# Altium PCB PCB.PcbDoc
Units mm, origin at the board's own origin, x right, y up, seen from the top; angles counter-clockwise.
Board outline 26.92 x 29.08 mm, 2 copper layers (Top Layer, Bottom Layer); 14 components, 7 nets, 39 pads, 0 vias.
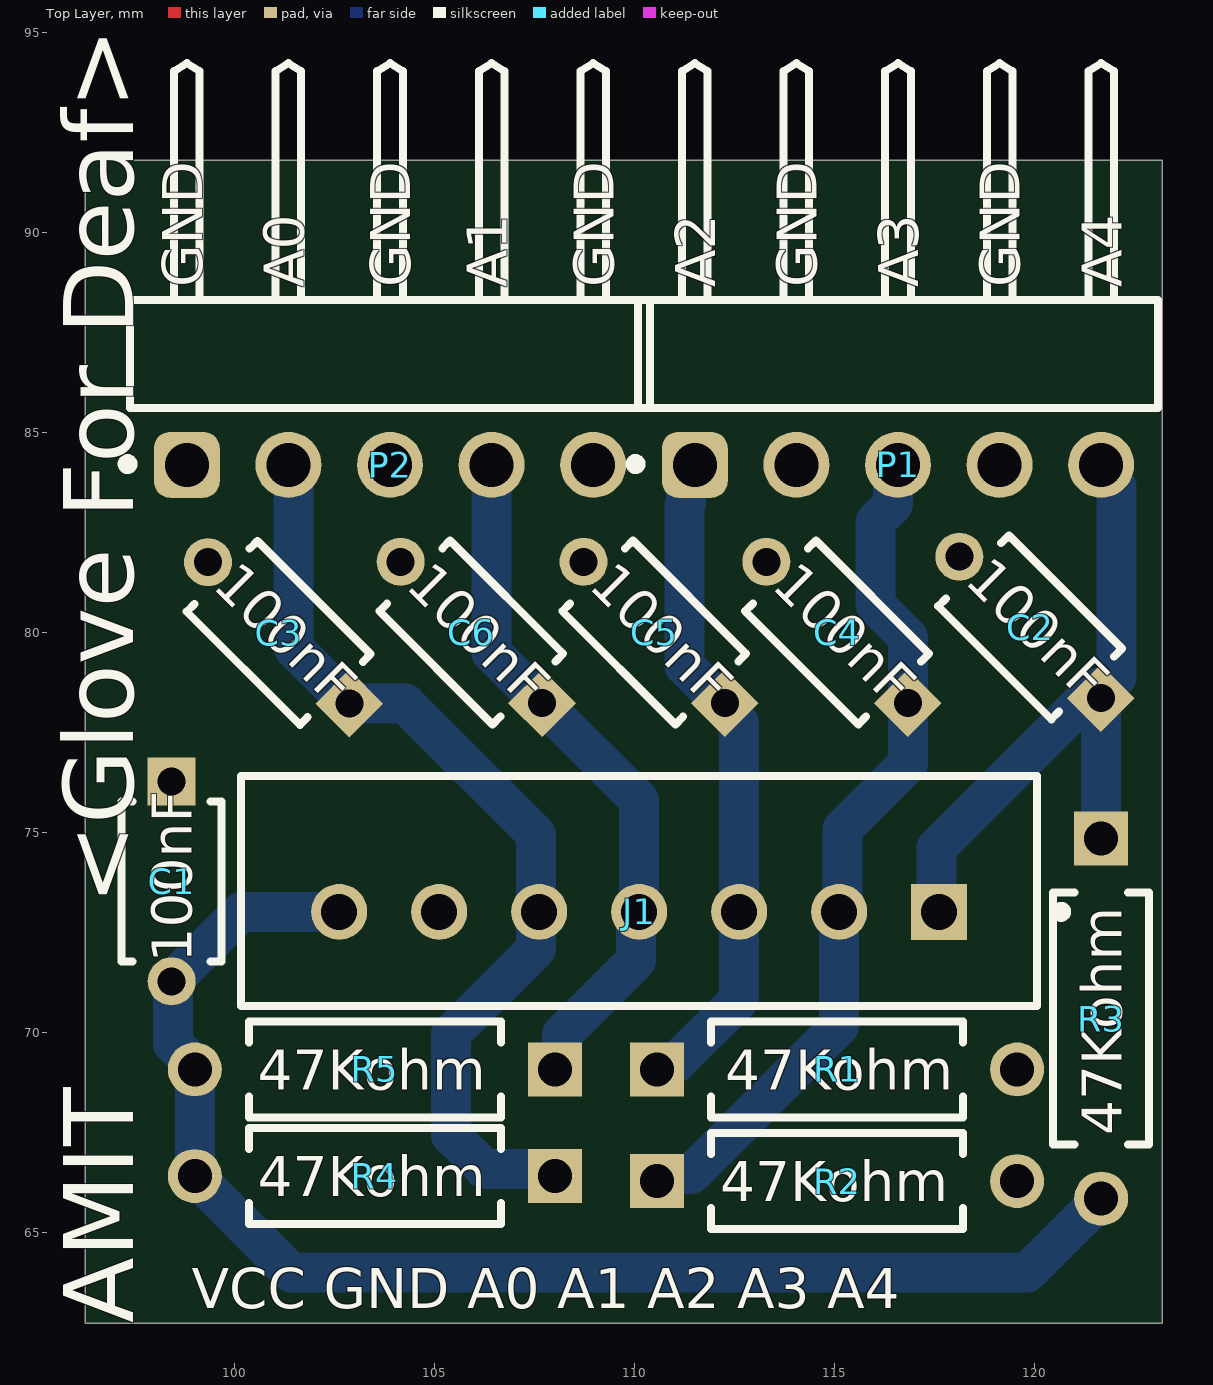
[diagram p0: Top Layer view]
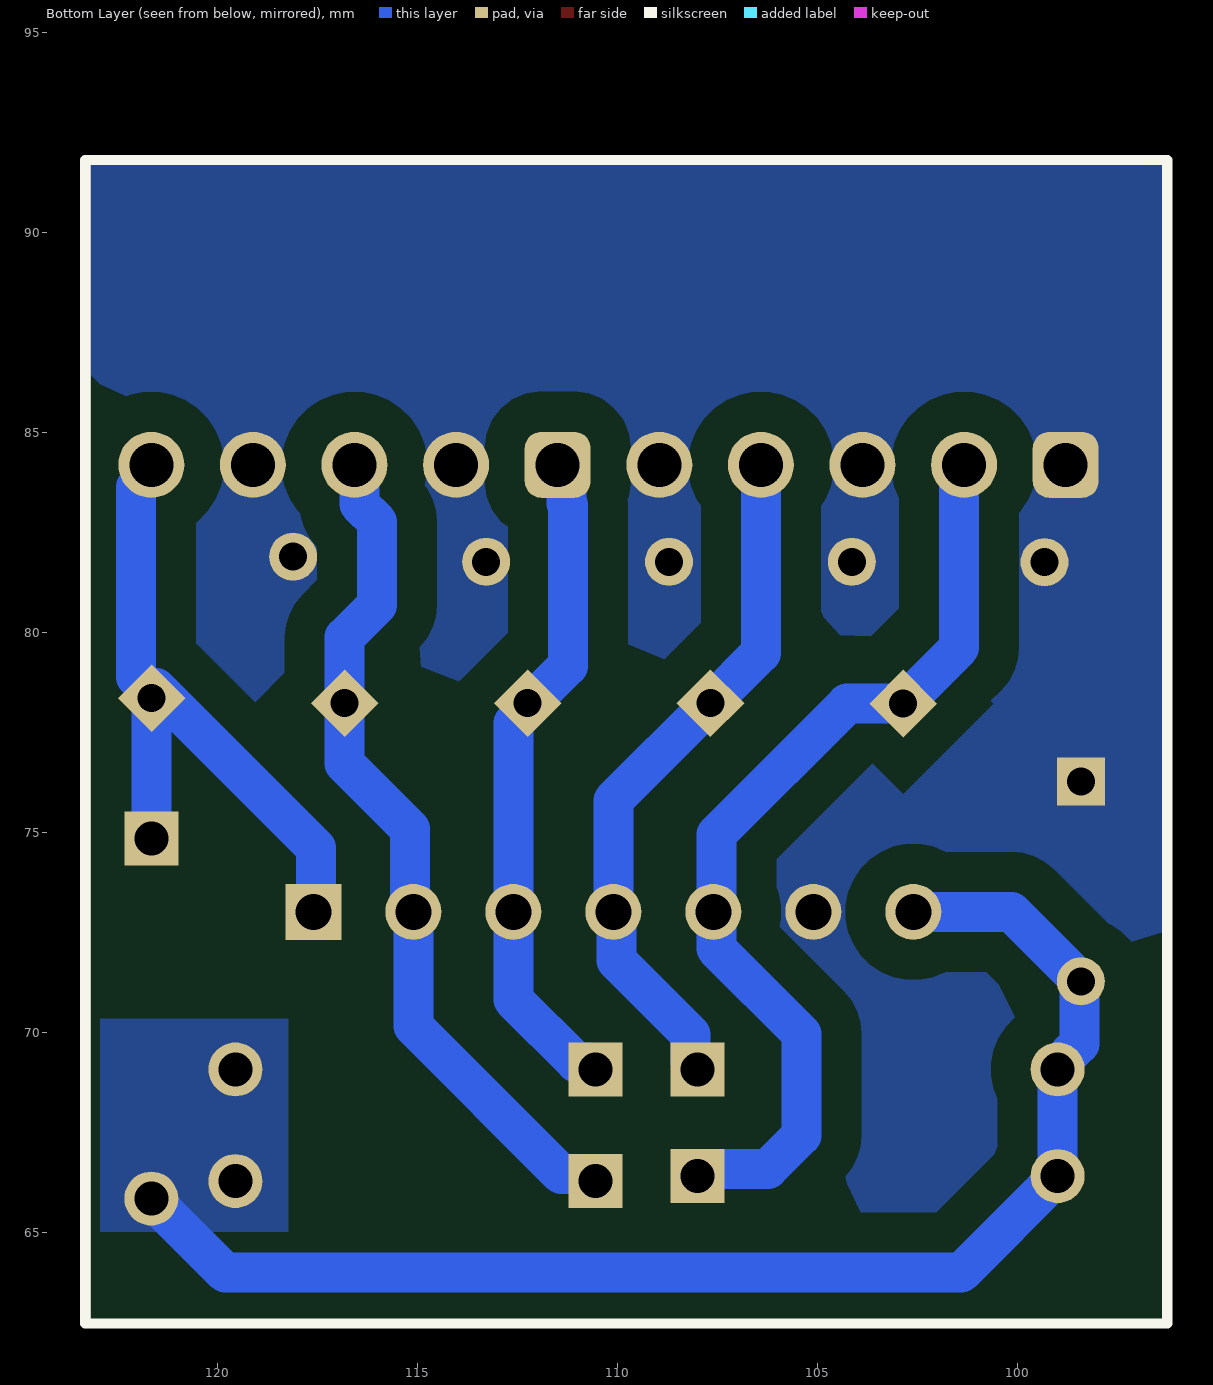
[diagram p1: Bottom Layer view, seen from below]
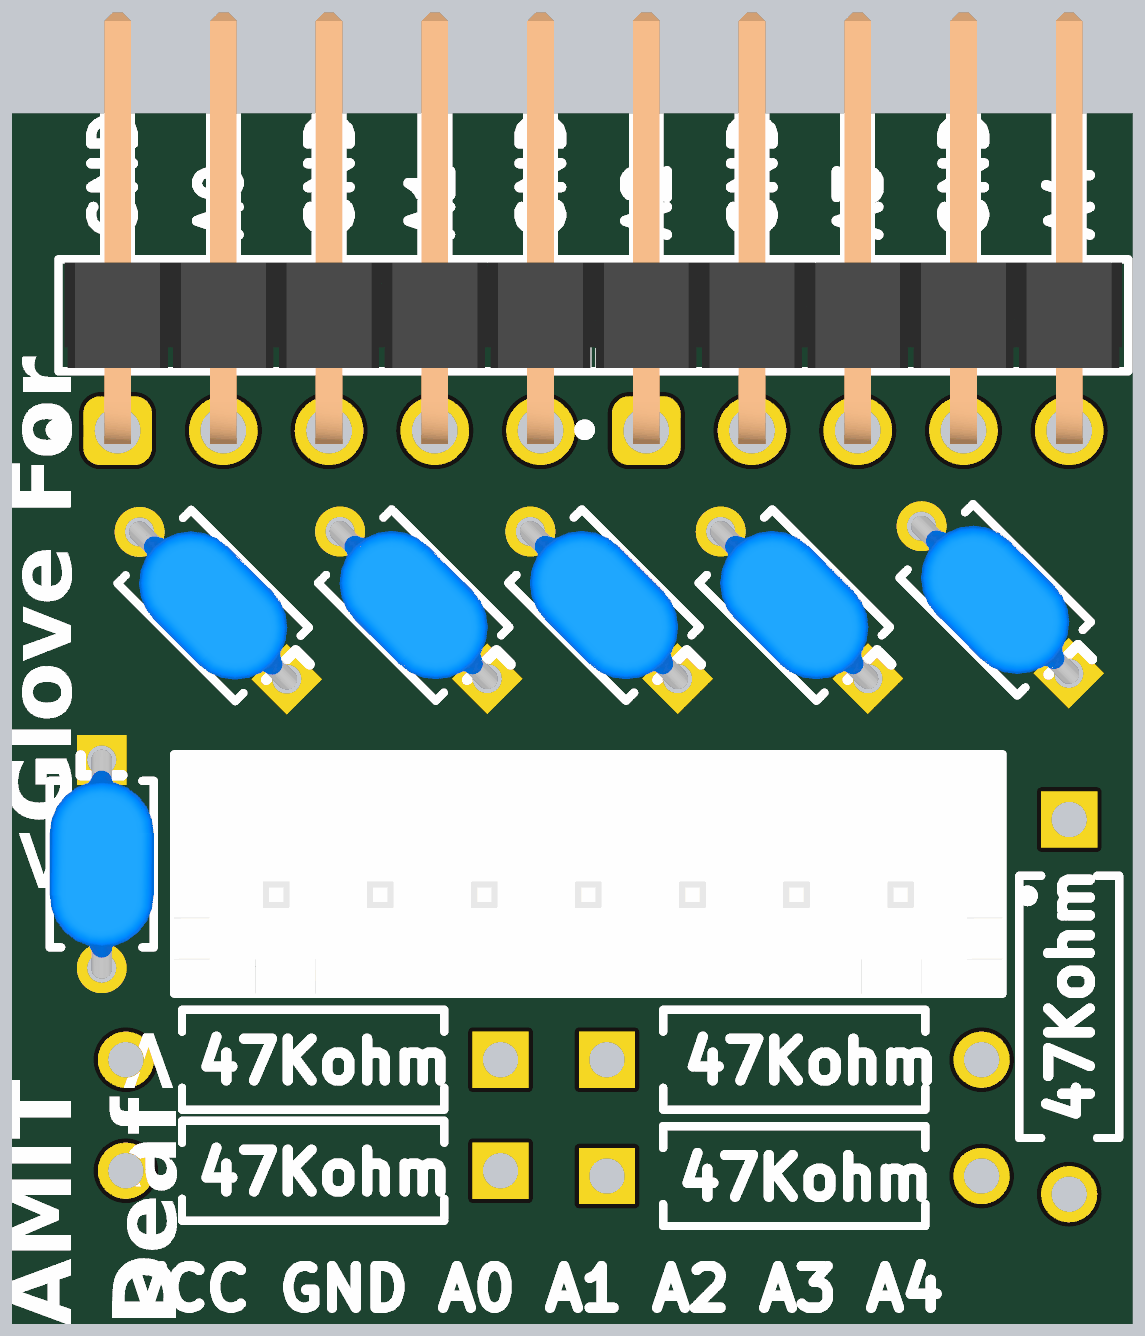
[diagram p2: 3D render of the assembled board from above, using the file's embedded part models]

## Layer stack, top to bottom
Top Solder: solder mask 0.0102, Solder Resist, Dk 3.5
Top Layer: signal copper 0.0356
Dielectric 1: dielectric 0.32, FR-4, Dk 4.8
Bottom Layer: signal copper 0.0356
Bottom Solder: solder mask 0.0102, Solder Resist, Dk 3.5

## Board outline
96.266,62.738 96.266,91.821 123.19,91.821 123.19,62.738

## Design rules (kind name [scope] priority, off if disabled: settings)
Clearance [All] p1: gap=1 ignorepadtopadclearanceinfootprint=FALSE
PlaneClearance [All] p1: clearance=1
PlaneConnect [All] p1: planeconnectstyle=Direct reliefexpansion=0.508 reliefentries=4 reliefconductorwidth=0.254 reliefairgap=0.254
PolygonConnect [All] p1: connectstyle=Direct reliefconductorwidth=0.254 reliefentries=4 polygonreliefangle="90 Angle" airgapwidth=0.254
RoutingVias [All] p1: holewidth=0.711 width=1.27 viastyle="Through Hole" minholewidth=0.711 minwidth=1.27 maxholewidth=0.711 maxwidth=1.27
SolderMaskExpansion [All] p1: expansion=0.102 istentingtop=FALSE
SupplyNets "Schematic Supply Nets_1" [InNet('GND')] p1: voltage=0.000
SupplyNets "Schematic Supply Nets" [InNet('VCC')] p2: voltage=0.000
Width [All] p1: maxlimit=1 minlimit=0.9 preferedwidth=1 minimp=50.000000 maximp=50.000000 favimp=50.000000
28 further rules are at their usual default settings.

## Components (designator, comment, footprint, x,y, rotation, side; value= is the part's Value field where it differs from the comment)
C1 "RDER71H104K0K1H03B" FP-RDE0M1-MFG 98.425,73.787 r270 top
C2 "RDER71H104K0K1H03B" FP-RDE0M1-MFG 119.888,80.137 r135 top
C3 "RDER71H104K0K1H03B" FP-RDE0M1-MFG 101.102,80 r135 top
C4 "RDER71H104K0K1H03B" FP-RDE0M1-MFG 115.062,80.01 r135 top
C5 "RDER71H104K0K1H03B" FP-RDE0M1-MFG 110.49,80.01 r135 top
C6 "RDER71H104K0K1H03B" FP-RDE0M1-MFG 105.918,80.01 r135 top
J1 "B7B-XH-A(LF)(SN)" FP-B7B-XH-A_LF_SN-MFG 110.116,73.55 r0 top
P1 "61300511021" 61300511021 116.586,86.971 r180 top
P2 "61300511021" 61300511021 103.886,86.971 r180 top
R1 "MFR-25FBF52-47R5" RESA60-630X240 115.062,69.088 r0 top value=47.5
R2 "MFR-25FBF52-47R5" RESA60-630X240 115.062,66.294 r0 top value=47.5
R3 "MFR-25FBF52-47R5" RESA60-630X240 121.666,70.358 r270 top value=47.5
R4 "MFR-25FBF52-47R5" RESA60-630X240 103.505,66.421 r180 top value=47.5
R5 "MFR-25FBF52-47R5" RESA60-630X240 103.505,69.088 r180 top value=47.5

## Footprints (in the part's own frame and the unit in brackets; to place one, negate y for a bottom-side part, rotate by r counter-clockwise, add the part's x,y. Pads: shape width x height; smd on the part's side, far side on the other; paste and mask are expansions set on the pad)
61300511021 [mm] "Pin Header, pitch 2.54 mm, THT, Angled, single row, 5p"
  rrect50% 1.65x1.65 hole 1.1: 1(5.08,2.77)
  round 1.65 hole 1.1: 2(2.54,2.77) 3(0,2.77) 4(-2.54,2.77) 5(-5.08,2.77)
  silkscreen extent -6.5,-7.27 6.68,2.87, body extent -6.35,-7.27 6.35,3.09, height 2.58
FP-B7B-XH-A_LF_SN-MFG [mm]
  rect 1.4x1.4 hole 0.9 paste-2539.97 mask+0: 1(7.5,-0.525)
  round 1.4 hole 0.9 paste-2539.97 mask+0: 2(5,-0.525) 3(2.5,-0.525) 4(0,-0.525) 5(-2.5,-0.525) 6(-5,-0.525) 7(-7.5,-0.525)
  silkscreen extent -9.95,-2.88 10.68,2.88, body extent -10.05,-2.98 10.05,2.98, height 0.25
FP-RDE0M1-MFG [mm]
  rect 1.2x1.2 hole 0.7 paste-2539.97 mask+0: 1(-2.5,0)
  round 1.2 hole 0.7 paste-2539.97 mask+0: 2(2.5,0)
  silkscreen extent -2,-1.25 2,1.25, body extent -3.2,-1.35 3.2,1.35, height 0.25
RESA60-630X240 [mm] "Axial Resistor, 2-Leads, Dia 2.4mm, Body Length 6.3mm"
  rect 1.35x1.35 hole 0.85: 1(-4.5,0)
  round 1.35 hole 0.85: 2(4.5,0)
  silkscreen extent -3.15,-1.2 3.15,1.2, body extent -4.77,-1.19 4.77,1.2, height 2.4

## Part data
C1 C2 C3 C4 C5 C6: library part CMP-06035-023286-1, "Ceramic Capacitor 100nF ±10% 50V X7R Radial", Capacitance=100nF, Case/Package=Radial, Dielectric=X7R, Max Operating Temperature=125°C, Min Operating Temperature=-55°C, Package Quantity=500, Resistor Type=Ceramic, Tolerance=10%, Voltage Rating=50V, Height=3.5mm, Height - Seated (Max)=0.236inch, Lead Diameter=0.5mm, Lead Free="Lead Free", Lead Pitch=0.197inch, Lead/Base Style=Kinked, Length=0.157inch, Mount="Through Hole", Packaging=Bulk, Termination=Radial, Voltage Rating (DC)=50V, Width=0.098inch
J1: library part CMP-17439-000323-2, "CONN HEADER VERT 7POS 2.5MM", Color=Natural, Contact Resistance=20mR, Current Rating=3A, Flammability Rating="UL94 V-0", Housing Color=White, Insulation Resistance=1GR, Max Operating Temperature=85°C, Max Voltage Rating (AC)=250V, Min Operating Temperature=-25°C, Connector Type=Header, Contact Finish - Mating=TIN, Contact Material=Brass, Contact Plating=Tin, Contact Shape=Square, Contact Type="Male Pin", Depth=5.75mm, Fastening Type=Detent, Housing Material=Polyamide, Insulation Color=Natural, Insulation Material=Nylon, Lead Free="Lead Free", Lead Pitch=2.5mm, Length=19.9mm, Mated Stacking Heights=9.8mm, Max Current Rating=3A, Mount="Through Hole", Number of Contacts=7, Number of Positions=7, Number of Rows=1, Orientation=Straight, Packaging=Bulk, Pitch=2.5mm, REACH SVHC="No SVHC", Series=XH, Termination=Solder, Voltage Rating=250V, Voltage Rating (AC)=250V, Wire/Cable Gauge=22AWG
P1 P2: library part CMP-1502-01067-3, Color=Black, Contact Resistance=20mΩ, Current Rating=3A, Operating Supply Voltage=250V, Connector Type="Male Pin", Contact Material=Copper, Contact Mating Length=5.9944mm, Contact Plating=Gold, Gender=Male, Lead Pitch=2.54mm, Mount="Through Hole", NexarPartId=32855525, Number of Contacts=5, Number of Pins=5, Number of Positions=5, Number of Rows=1, Packaging=Bulk, Pitch=2.54mm, REACH SVHC=Unknown, RoHS=Compliant, Termination=Solder
R1 R2 R3 R4 R5: library part CMP-009-00058-4, "Axial Resistor, 47.5 Ohm, +/- 1%, 0.25 W, -55 to 155 degC, 2-Pin THD, RoHS, Bulk", Case/Package=Axial, Manufacturer=Yageo, Max Operating Temperature=155°C, Min Operating Temperature=-55°C, Package Description="2-Pin Axial Lead, Dia 2.4 mm, Body Length 6.3 mm", Package Quantity=200, Package Reference=MFR-25, Power=250mW, Tolerance=1%, Voltage Rating=250V, Datasheet URL=http://www.yageo.com/documents/recent/Yageo%20LR_MFR_2013.pdf, Datasheet Version=Apr-13, Manufacturer URL=http://www.yageo.com/, Mounting Technology=TH, Packaging=Bulk, RoHS Compliant=True

## Nets (pads, with @x,y where several pads share a name; then routed paths per layer and width w, separated by ;. In a path a pad name is that pad's centre, name@x,y a point inside that pad or via, vN(x,y) a via of type N, cw(c..) or ccw(c..) an arc to the next point about the centre after c; other vN are vias at no path point)
GND: C1.1 C2.2 C3.2 C4.2 C5.2 C6.2 J1.6 P1.2 P1.4 P2.1 P2.3 P2.5
NetC2_1: C2.1 J1.1 P1.5 R3.1 | length 16.9
  Bottom Layer w1: J1.1 117.544,73.097 117.544,74.618 C2.1@121.542,78.616 ; R3.1 121.656,74.868 C2.1 121.656,78.511 122.047,78.902 122.047,83.644 121.666,84.025 P1.5
NetC3_1: C3.1 J1.5 P2.2 R4.1 | length 24.2
  Bottom Layer w1: P2.2 101.47,84.077 101.47,79.632 C3.1 104.267,78.232 107.539,74.96 107.539,73.039 J1.5@107.616,72.962 ; J1.5 107.539,72.948 107.539,72.106 105.41,69.977 105.41,67.437 106.251,66.596 107.83,66.596 R4.1
NetC4_1: C4.1 J1.2 P1.3 R2.1 | length 21.4
  Bottom Layer w1: R2.1 110.737,66.469 111.414,66.469 115.116,70.171 J1.2 ; J1.2@115.085,73.102 115.193,73.21 115.193,75.095 116.83,76.732 C4.1 116.83,79.893 116.02,80.703 116.02,82.775 116.462,83.216 116.462,84.077 P1.3
NetC5_1: C5.1 J1.3 P1.1 R1.1 | length 16.9
  Bottom Layer w1: R1.1 110.737,69.263 111.046,69.263 112.616,70.833 112.616,77.743 112.258,78.101 C5.1 112.186,78.242 111.252,79.177 111.252,83.199 111.291,83.238 111.291,83.986 P1.1
NetC6_1: C6.1 J1.4 P2.4 R5.1 | length 17.5
  Bottom Layer w1: P2.4 106.426,79.502 C6.1 110.116,75.812 J1.4 110.039,72.948 110.039,71.812 108.18,69.953 108.18,69.263 R5.1
VCC: C1.2 J1.7 R1.2 R2.2 R3.2 R4.2 R5.2 | length 34.4
  Bottom Layer w1: J1.7 100.163,73.025 C1.2 98.463,71.249 98.463,69.724 99.005,69.183 R5.2 R4.2 101.418,64.008 119.816,64.008 R3.2

## Polygon pours and split planes (outlines as drawn)
GND on Bottom Layer "NONET_L-01_P-001" (solid, remove dead copper, pour order 2): 96.266,91.821 123.19,91.821 123.19,62.738 96.266,62.738
VCC on Bottom Layer "NONET_L-01_P-001" (solid, remove dead copper, pour order 0): 118.237,70.358 122.936,70.358 122.936,65.024 118.237,65.024

## Silkscreen, mask and mechanical layers (free items; w line width, h text height)
Top Overlay:
  text "GND" at 99.187,88.646 h1 r90
  text "A0" at 101.727,88.646 h1 r90
  text "GND" at 104.394,88.646 h1 r90
  text "A1" at 106.807,88.646 h1 r90
  text "GND" at 109.474,88.646 h1 r90
  text "A2" at 112.014,88.646 h1 r90
  text "GND" at 114.554,88.646 h1 r90
  text "A3" at 117.094,88.646 h1 r90
  text "GND" at 119.634,88.646 h1 r90
  text "A4" at 122.174,88.646 h1 r90
  text "100nF" at 118.215,81.28 h1 r315
  text "100nF" at 99.419,81.153 h1 r315
  text "100nF" at 104.245,81.153 h1 r315
  text "100nF" at 108.817,81.153 h1 r315
  text "100nF" at 113.389,81.153 h1 r315
  text "100nF" at 98.933,71.755 h1 r90
  text "47Kohm" at 100.584,68.58 h1
  text "47Kohm" at 112.268,68.58 h1
  text "47Kohm" at 122.174,67.437 h1 r90
  text "47Kohm" at 100.584,65.913 h1
  text "47Kohm" at 112.141,65.786 h1
  text "VCC GND A0 A1 A2 A3 A4" at 98.933,63.119 h1
  text "AMIT      <Glove For Deaf>" at 98.044,62.738 h3 r90
Bottom Overlay:
  lines w0.254: 96.266,62.738 123.317,62.738 123.317,91.821 96.266,91.821 96.266,62.738